# EAGLE board lf-antenna (EAGLE 6.5.0)
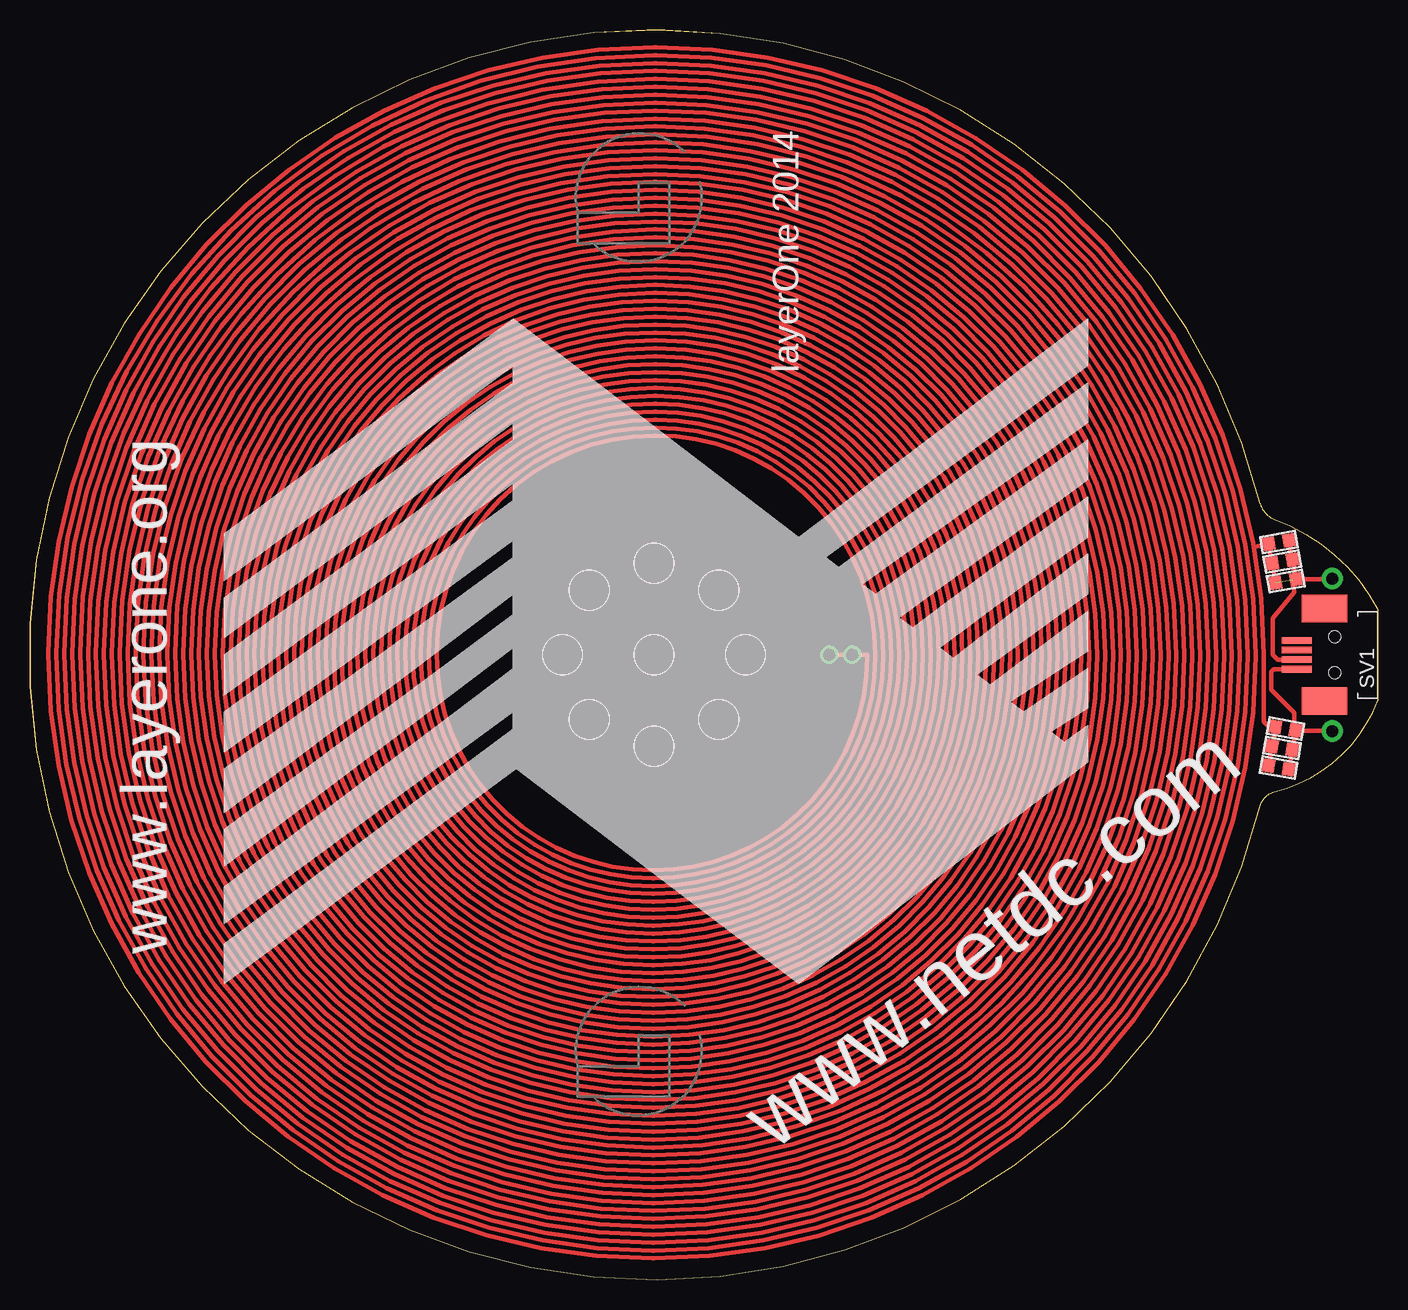
[diagram p0: board, top side]
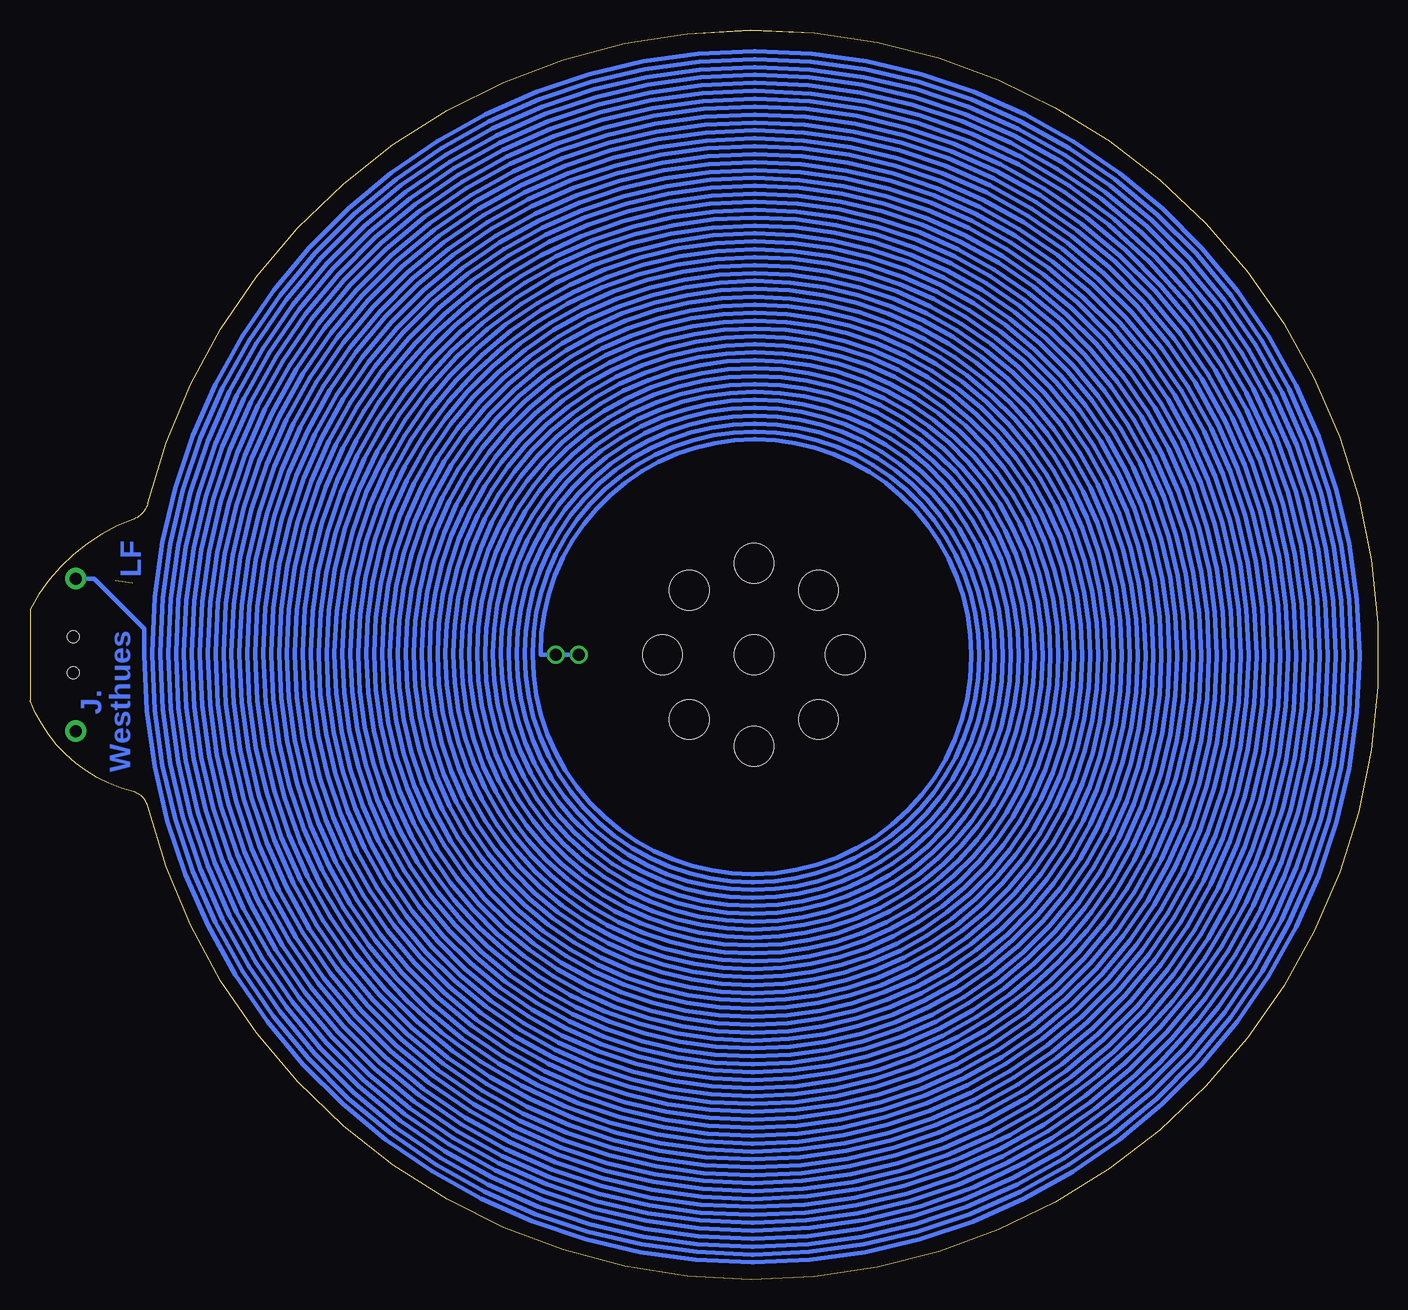
[diagram p1: board, bottom side, seen from below]

Size 112.33 x 104.14 mm. Coordinates in mm from the lower left corner, seen from the top.
Outline: 102.53,64.67 arc332 102.53,39.47 arc-62 103.69,40.64 arc55 112.33,48.26 112.33,55.88 arc42 103.69,63.37 arc-56 102.53,64.67
Copper layers (1*16): Top 0.035mm / dielectric 1.5mm / Bottom 0.035mm
Design rules "ITEADstudio_DRC": minimum track width 6mil, minimum drill 12mil, track to track 6mil, track to pad 6mil, pad to pad 6mil, via to via 6mil, smd to smd 0mil, copper to edge 10mil, drill to drill 10mil, minimum pad ring 10mil, minimum via ring 6mil, stop-mask expansion 2mil, vias tented up to drill 100mil, thermal gap 10mil
Holes 3.3 mm at 52,52.07 44.38,52.07 52,59.69 52,44.45 59.62,52.07 46.61,46.68 57.39,46.68 57.39,57.46 46.61,57.46
Milling: 6 lines

## Footprints (pad centres in the part's own frame; a part is rotated, then mirrored left to right if it is on the bottom)
RLC_0603 = smd 1 x 1.1: 1 -0.85,0; 2 0.85,0
HIROSE-MQ172-4POS = smd 0.55 x 2.5: 1 -1.2,6.75; 2 -0.4,6.75; 3 0.4,6.75; 4 1.2,6.75 | smd 2.3 x 3.8: P$1 -3.85,4.45; P$2 3.85,4.45 | hole 1: -1.5,3.6; 1.5,3.6

## Placement (x,y rotation side)
E$1  [L1LOGO]  50.73,19.05 90 top
E$2  dnp  [RLC_0603]  104.65,58.21 190 top
E$3  1000 pF  [RLC_0603]  104.36,59.83 190 top
E$4  220 pF  [RLC_0603]  104.07,61.46 190 top
E$5  dnp  [RLC_0603]  104.05,42.67 170 top
E$6  dnp  [RLC_0603]  104.34,44.3 170 top
E$7  zerohm  [RLC_0603]  104.62,45.93 170 top
E$8  [L1LOGO]  50.73,90.17 90 top
SV1  [HIROSE-MQ172-4POS]  112.33,52.07 90 top

## Library data of the parts
E$1 E$8 = STM32-PROX
E$2-E$7 SV1 =   merged

## Nets
BUFD: E$5.1 E$6.1 E$7.1 SV1.1
RAW: E$2.1 E$2.2 E$3.1 E$3.2 E$4.1 E$4.2 E$5.2 E$6.2 E$7.2 SV1.2

## Tracks (layer width: path | path; a pad name or v marks a point on that pad's centre or on a via)
BUFD  (via drill 1 pad 1.78)
  Top 0.381: 104.92,42.48 E$5.1 105.22,44.2 E$6.1 | 105.19,44.02 105.21,44.11 E$6.1 | E$7.1 105.49,45.73 108.5,45.73 v108.52,45.72 | E$7.1 105.47,45.72 E$6.1 | SV1.1 103.63,50.87 103.44,50.67 103.44,49.15 105.34,47.24 105.34,45.72 105.4,45.78 E$7.1
RAW  (via drill 1, 1 pad 1.78)  (1 unrouted)
  Top 0.381: 69.78,52.07 69.78,51.9 arc-90 52,34.12 51.84,34.12 arc-90 33.89,52.07 33.89,52.23 arc-90 52,70.34 52.17,70.34 arc-90 70.44,52.07 70.44,51.9 arc-90 52,33.46 51.84,33.46 arc-90 33.23,52.07 33.23,52.23 arc-90 52,71 52.17,71 arc-90 71.1,52.07 71.1,51.9 arc-90 52,32.8 51.84,32.8 arc-90 32.57,52.07 32.57,52.23 arc-90 52,71.67 52.17,71.67 arc-90 71.76,52.07 71.76,51.9 arc-90 52,32.14 51.84,32.14 arc-90 31.91,52.07 31.91,52.23 arc-90 52,72.33 52.17,72.33 arc-90 72.42,52.07 72.42,51.9 arc-90 52,31.48 51.84,31.48 arc-90 31.25,52.07 31.25,52.23 arc-90 52,72.99 52.17,72.99 arc-90 73.08,52.07 73.08,51.9 arc-90 52,30.82 51.84,30.82 arc-90 30.59,52.07 30.59,52.23 arc-90 52,73.65 52.17,73.65 arc-90 73.74,52.07 73.74,51.9 arc-90 52,30.16 51.84,30.16 arc-90 29.93,52.07 29.93,52.23 arc-90 52,74.31 52.17,74.31 arc-90 74.41,52.07 74.41,51.9 arc-90 52,29.5 51.84,29.5 arc-90 29.27,52.07 29.27,52.23 arc-90 52,74.97 52.17,74.97 arc-90 75.07,52.07 75.07,51.9 arc-90 52,28.84 51.84,28.84 arc-90 28.61,52.07 28.61,52.23 arc-90 52,75.63 52.17,75.63 arc-90 75.73,52.07 75.73,51.9 arc-90 52,28.18 51.84,28.18 arc-90 27.95,52.07 27.95,52.23 arc-90 52,76.29 52.17,76.29 arc-90 76.39,52.07 76.39,51.9 arc-90 52,27.52 51.84,27.52 arc-90 27.29,52.07 27.29,52.23 arc-90 52,76.95 52.17,76.95 arc-90 77.05,52.07 77.05,51.9 arc-90 52,26.86 51.84,26.86 arc-90 26.63,52.07 26.63,52.23 arc-90 52,77.61 52.17,77.61 arc-90 77.71,52.07 77.71,51.9 arc-90 52,26.2 51.84,26.2 arc-90 25.97,52.07 25.97,52.23 arc-90 52,78.27 52.17,78.27 arc-90 78.37,52.07 78.37,51.9 arc-90 52,25.54 51.84,25.54 arc-90 25.31,52.07 25.31,52.23 arc-90 52,78.93 52.17,78.93 arc-90 79.03,52.07 79.03,51.9 arc-90 52,24.88 51.84,24.88 arc-90 24.65,52.07 24.65,52.23 arc-90 52,79.59 52.17,79.59 arc-90 79.69,52.07 79.69,51.9 arc-90 52,24.22 51.84,24.22 arc-90 23.99,52.07 23.99,52.23 arc-90 52,80.25 52.17,80.25 arc-90 80.35,52.07 80.35,51.9 arc-90 52,23.56 51.84,23.56 arc-90 23.33,52.07 23.33,52.23 arc-90 52,80.91 52.17,80.91 arc-90 81.01,52.07 81.01,51.9 arc-90 52,22.9 51.84,22.9 arc-90 22.67,52.07 22.67,52.23 arc-90 52,81.57 52.17,81.57 arc-90 81.67,52.07 81.67,51.9 arc-90 52,22.24 51.84,22.24 arc-90 22.01,52.07 22.01,52.23 arc-90 52,82.23 52.17,82.23 arc-90 82.33,52.07 82.33,51.9 arc-90 52,21.58 51.84,21.58 arc-90 21.34,52.07 21.35,52.23 arc-90 52,82.89 52.17,82.89 arc-90 82.99,52.07 82.99,51.9 arc-90 52,20.92 51.84,20.92 arc-90 20.68,52.07 20.68,52.23 arc-90 52,83.55 52.17,83.55 arc-90 83.65,52.07 83.65,51.9 arc-90 52,20.26 51.84,20.26 arc-90 20.02,52.07 20.02,52.23 arc-90 52,84.21 52.17,84.21 arc-90 84.31,52.07 84.31,51.9 arc-90 52,19.6 51.84,19.6 arc-90 19.36,52.07 19.36,52.23 arc-90 52,84.87 52.17,84.87 arc-90 84.97,52.07 84.97,51.9 arc-90 52,18.94 51.84,18.94 arc-90 18.7,52.07 18.7,52.23 arc-90 52,85.53 52.17,85.53 arc-90 85.63,52.07 85.63,51.9 arc-90 52,18.28 51.84,18.27 arc-90 18.04,52.07 18.04,52.23 arc-90 52,86.19 52.17,86.19 arc-90 86.29,52.07 86.29,51.9 arc-90 52,17.61 51.84,17.61 arc-90 17.38,52.07 17.38,52.23 arc-90 52,86.85 52.17,86.85 arc-90 86.95,52.07 86.95,51.9 arc-90 52,16.95 51.84,16.95 arc-90 16.72,52.07 16.72,52.23 arc-90 52,87.51 52.17,87.52 arc-90 87.61,52.07 87.61,51.9 arc-90 52,16.29 51.84,16.29 arc-90 16.06,52.07 16.06,52.23 arc-90 52,88.18 52.17,88.18 arc-90 88.27,52.07 88.27,51.9 arc-90 52,15.63 51.84,15.63 arc-90 15.4,52.07 15.4,52.23 arc-90 52,88.84 52.17,88.84 arc-90 88.93,52.07 88.93,51.9 arc-90 52,14.97 51.84,14.97 arc-90 14.74,52.07 14.74,52.23 arc-90 52,89.5 52.17,89.5 arc-90 89.59,52.07 89.59,51.9 arc-90 52,14.31 51.84,14.31 arc-90 14.08,52.07 14.08,52.23 arc-90 52,90.16 52.17,90.16 arc-90 90.25,52.07 90.25,51.9 arc-90 52,13.65 51.84,13.65 arc-90 13.42,52.07 13.42,52.23 arc-90 52,90.82 52.17,90.82 arc-90 90.92,52.07 90.92,51.9 arc-90 52,12.99 51.84,12.99 arc-90 12.76,52.07 12.76,52.23 arc-90 52,91.48 52.17,91.48 arc-90 91.58,52.07 91.58,51.9 arc-90 52,12.33 51.84,12.33 arc-90 12.1,52.07 12.1,52.23 arc-90 52,92.14 52.17,92.14 arc-90 92.24,52.07 92.24,51.9 arc-90 52,11.67 51.84,11.67 arc-90 11.44,52.07 11.44,52.23 arc-90 52,92.8 52.17,92.8 arc-90 92.9,52.07 92.9,51.9 arc-90 52,11.01 51.84,11.01 arc-90 10.78,52.07 10.78,52.23 arc-90 52,93.46 52.17,93.46 arc-90 93.56,52.07 93.56,51.9 arc-90 52,10.35 51.84,10.35 arc-90 10.12,52.07 10.12,52.23 arc-90 52,94.12 52.17,94.12 arc-90 94.22,52.07 94.22,51.9 arc-90 52,9.69 51.84,9.69 arc-90 9.46,52.07 9.46,52.23 arc-90 52,94.78 52.17,94.78 arc-90 94.88,52.07 94.88,51.9 arc-90 52,9.03 51.84,9.03 arc-90 8.8,52.07 8.8,52.23 arc-90 52,95.44 52.17,95.44 arc-90 95.54,52.07 95.54,51.9 arc-90 52,8.37 51.84,8.37 arc-90 8.14,52.07 8.14,52.23 arc-90 52,96.1 52.17,96.1 arc-90 96.2,52.07 96.2,51.9 arc-90 52,7.71 51.84,7.71 arc-90 7.48,52.07 7.48,52.23 arc-90 52,96.76 52.17,96.76 arc-90 96.86,52.07 96.86,51.9 arc-90 52,7.05 51.84,7.05 arc-90 6.82,52.07 6.82,52.23 arc-90 52,97.42 52.17,97.42 arc-90 97.52,52.07 97.52,51.9 arc-90 52,6.39 51.84,6.39 arc-90 6.16,52.07 6.16,52.23 arc-90 52,98.08 52.17,98.08 arc-90 98.18,52.07 98.18,51.9 arc-90 52,5.73 51.84,5.73 arc-90 5.5,52.07 5.5,52.23 arc-90 52,98.74 52.17,98.74 arc-90 98.84,52.07 98.84,51.9 arc-90 52,5.07 51.84,5.07 arc-90 4.83,52.07 4.83,52.23 arc-90 52,99.4 52.17,99.4 arc-90 99.5,52.07 99.5,51.9 arc-90 52,4.41 51.84,4.41 arc-90 4.17,52.07 4.17,52.23 arc-90 52,100.06 52.17,100.06 arc-90 100.16,52.07 100.16,51.9 arc-90 52,3.75 51.84,3.75 arc-90 3.51,52.07 3.51,52.23 arc-90 52,100.72 52.17,100.72 arc-90 100.82,52.07 100.82,51.9 arc-90 52,3.09 51.84,3.09 arc-90 2.85,52.07 2.85,52.23 arc-90 52,101.38 52.17,101.38 arc-90 101.48,52.07 101.48,51.9 arc-90 52,2.43 51.84,2.43 arc-90 2.19,52.07 2.19,52.23 arc-90 52,102.04 52.17,102.04 arc-90 102.14,52.07 102.14,51.9 arc-90 52,1.77 51.84,1.77 arc-90 1.53,52.07 1.53,52.23 arc-90 52,102.7 52.17,102.7 arc-90 102.8,52.07 102.8,51.69 102.8,46.48 103.06,46.23 103.56,46.23 103.72,46.07 E$7.2
  Top 0.381: v66.61,52.07 v68.51,52.07 69.78,52.07 | E$2.1 E$3.1 E$4.1 | E$2.2 103.79,58.15 103.75,58.18 103.78,58.23 103.56,59.56 E$3.2 103.48,59.68 103.51,59.73 103.18,61.21 103.22,61.29 | 103.22,61.29 E$4.2 | 103.22,61.29 102.04,61.06 | v108.52,58.42 108.52,58.29 108.45,58.36 E$2.1 | E$7.2 103.74,46.04 | 103.61,44.56 103.6,44.52 E$6.2 | E$6.2 103.47,44.49 | E$6.2 103.44,44.32 E$5.2 | E$7.2 103.82,45.97 E$6.2 | 69.78,52.07 | v66.61,52.07 | v66.61,52.07 69.78,52.07 | SV1.2 103.96,51.67 103.56,52.07 103.56,55.12 105.34,57.28 105.22,58.29 E$2.1
  Bottom 0.381: 67.24,52.07 69.78,52.07 69.78,52.23 arc90 52,70.01 51.84,70.01 arc90 33.89,52.07 33.89,51.9 arc90 52,33.79 52.17,33.79 arc90 70.44,52.07 70.44,52.23 arc90 52,70.67 51.84,70.67 arc90 33.23,52.07 33.23,51.9 arc90 52,33.13 52.17,33.13 arc90 71.1,52.07 71.1,52.23 arc90 52,71.34 51.84,71.34 arc90 32.57,52.07 32.57,51.9 arc90 52,32.47 52.17,32.47 arc90 71.76,52.07 71.76,52.23 arc90 52,72 51.84,72 arc90 31.91,52.07 31.91,51.9 arc90 52,31.81 52.17,31.81 arc90 72.42,52.07 72.42,52.23 arc90 52,72.66 51.84,72.66 arc90 31.25,52.07 31.25,51.9 arc90 52,31.15 52.17,31.15 arc90 73.08,52.07 73.08,52.23 arc90 52,73.32 51.84,73.32 arc90 30.59,52.07 30.59,51.9 arc90 52,30.49 52.17,30.49 arc90 73.74,52.07 73.74,52.23 arc90 52,73.98 51.84,73.98 arc90 29.93,52.07 29.93,51.9 arc90 52,29.83 52.17,29.83 arc90 74.41,52.07 74.41,52.23 arc90 52,74.64 51.84,74.64 arc90 29.27,52.07 29.27,51.9 arc90 52,29.17 52.17,29.17 arc90 75.07,52.07 75.07,52.23 arc90 52,75.3 51.84,75.3 arc90 28.61,52.07 28.61,51.9 arc90 52,28.51 52.17,28.51 arc90 75.73,52.07 75.73,52.23 arc90 52,75.96 51.84,75.96 arc90 27.95,52.07 27.95,51.9 arc90 52,27.85 52.17,27.85 arc90 76.39,52.07 76.39,52.23 arc90 52,76.62 51.84,76.62 arc90 27.29,52.07 27.29,51.9 arc90 52,27.19 52.17,27.19 arc90 77.05,52.07 77.05,52.23 arc90 52,77.28 51.84,77.28 arc90 26.63,52.07 26.63,51.9 arc90 52,26.53 52.17,26.53 arc90 77.71,52.07 77.71,52.23 arc90 52,77.94 51.84,77.94 arc90 25.97,52.07 25.97,51.9 arc90 52,25.87 52.17,25.87 arc90 78.37,52.07 78.37,52.23 arc90 52,78.6 51.84,78.6 arc90 25.31,52.07 25.31,51.9 arc90 52,25.21 52.17,25.21 arc90 79.03,52.07 79.03,52.23 arc90 52,79.26 51.84,79.26 arc90 24.65,52.07 24.65,51.9 arc90 52,24.55 52.17,24.55 arc90 79.69,52.07 79.69,52.23 arc90 52,79.92 51.84,79.92 arc90 23.99,52.07 23.99,51.9 arc90 52,23.89 52.17,23.89 arc90 80.35,52.07 80.35,52.23 arc90 52,80.58 51.84,80.58 arc90 23.33,52.07 23.33,51.9 arc90 52,23.23 52.17,23.23 arc90 81.01,52.07 81.01,52.23 arc90 52,81.24 51.84,81.24 arc90 22.67,52.07 22.67,51.9 arc90 52,22.57 52.17,22.57 arc90 81.67,52.07 81.67,52.23 arc90 52,81.9 51.84,81.9 arc90 22.01,52.07 22.01,51.9 arc90 52,21.91 52.17,21.91 arc90 82.33,52.07 82.33,52.23 arc90 52,82.56 51.84,82.56 arc90 21.34,52.07 21.34,51.9 arc90 52,21.25 52.17,21.25 arc90 82.99,52.07 82.99,52.23 arc90 52,83.22 51.84,83.22 arc90 20.68,52.07 20.68,51.9 arc90 52,20.59 52.17,20.59 arc90 83.65,52.07 83.65,52.23 arc90 52,83.88 51.84,83.88 arc90 20.02,52.07 20.02,51.9 arc90 52,19.93 52.17,19.93 arc90 84.31,52.07 84.31,52.23 arc90 52,84.54 51.84,84.54 arc90 19.36,52.07 19.36,51.9 arc90 52,19.27 52.17,19.27 arc90 84.97,52.07 84.97,52.23 arc90 52,85.2 51.84,85.2 arc90 18.7,52.07 18.7,51.9 arc90 52,18.61 52.17,18.61 arc90 85.63,52.07 85.63,52.23 arc90 52,85.86 51.84,85.86 arc90 18.04,52.07 18.04,51.9 arc90 52,17.94 52.17,17.94 arc90 86.29,52.07 86.29,52.23 arc90 52,86.52 51.84,86.52 arc90 17.38,52.07 17.38,51.9 arc90 52,17.28 52.17,17.28 arc90 86.95,52.07 86.95,52.23 arc90 52,87.18 51.84,87.18 arc90 16.72,52.07 16.72,51.9 arc90 52,16.62 52.17,16.62 arc90 87.61,52.07 87.61,52.23 arc90 52,87.85 51.84,87.85 arc90 16.06,52.07 16.06,51.9 arc90 52,15.96 52.17,15.96 arc90 88.27,52.07 88.27,52.23 arc90 52,88.51 51.84,88.51 arc90 15.4,52.07 15.4,51.9 arc90 52,15.3 52.17,15.3 arc90 88.93,52.07 88.93,52.23 arc90 52,89.17 51.84,89.17 arc90 14.74,52.07 14.74,51.9 arc90 52,14.64 52.17,14.64 arc90 89.59,52.07 89.59,52.23 arc90 52,89.83 51.84,89.83 arc90 14.08,52.07 14.08,51.9 arc90 52,13.98 52.17,13.98 arc90 90.25,52.07 90.25,52.23 arc90 52,90.49 51.84,90.49 arc90 13.42,52.07 13.42,51.9 arc90 52,13.32 52.17,13.32 arc90 90.92,52.07 90.92,52.23 arc90 52,91.15 51.84,91.15 arc90 12.76,52.07 12.76,51.9 arc90 52,12.66 52.17,12.66 arc90 91.58,52.07 91.58,52.23 arc90 52,91.81 51.84,91.81 arc90 12.1,52.07 12.1,51.9 arc90 52,12 52.17,12 arc90 92.24,52.07 92.24,52.23 arc90 52,92.47 51.84,92.47 arc90 11.44,52.07 11.44,51.9 arc90 52,11.34 52.17,11.34 arc90 92.9,52.07 92.9,52.23 arc90 52,93.13 51.84,93.13 arc90 10.78,52.07 10.78,51.9 arc90 52,10.68 52.17,10.68 arc90 93.56,52.07 93.56,52.23 arc90 52,93.79 51.84,93.79 arc90 10.12,52.07 10.12,51.9 arc90 52,10.02 52.17,10.02 arc90 94.22,52.07 94.22,52.23 arc90 52,94.45 51.84,94.45 arc90 9.46,52.07 9.46,51.9 arc90 52,9.36 52.17,9.36 arc90 94.88,52.07 94.88,52.23 arc90 52,95.11 51.84,95.11 arc90 8.8,52.07 8.8,51.9 arc90 52,8.7 52.17,8.7 arc90 95.54,52.07 95.54,52.23 arc90 52,95.77 51.84,95.77 arc90 8.14,52.07 8.14,51.9 arc90 52,8.04 52.17,8.04 arc90 96.2,52.07 96.2,52.23 arc90 52,96.43 51.84,96.43 arc90 7.48,52.07 7.48,51.9 arc90 52,7.38 52.17,7.38 arc90 96.86,52.07 96.86,52.23 arc90 52,97.09 51.84,97.09 arc90 6.82,52.07 6.82,51.9 arc90 52,6.72 52.17,6.72 arc90 97.52,52.07 97.52,52.23 arc90 52,97.75 51.84,97.75 arc90 6.16,52.07 6.16,51.9 arc90 52,6.06 52.17,6.06 arc90 98.18,52.07 98.18,52.23 arc90 52,98.41 51.84,98.41 arc90 5.5,52.07 5.5,51.9 arc90 52,5.4 52.17,5.4 arc90 98.84,52.07 98.84,52.23 arc90 52,99.07 51.84,99.07 arc90 4.83,52.07 4.83,51.9 arc90 52,4.74 52.17,4.74 arc90 99.5,52.07 99.5,52.23 arc90 52,99.73 51.84,99.73 arc90 4.17,52.07 4.17,51.9 arc90 52,4.08 52.17,4.08 arc90 100.16,52.07 100.16,52.23 arc90 52,100.39 51.84,100.39 arc90 3.51,52.07 3.51,51.9 arc90 52,3.42 52.17,3.42 arc90 100.82,52.07 100.82,52.23 arc90 52,101.05 51.84,101.05 arc90 2.85,52.07 2.85,51.9 arc90 52,2.76 52.17,2.76 arc90 101.48,52.07 101.48,52.23 arc90 52,101.71 51.84,101.71 arc90 2.19,52.07 2.19,51.9 arc90 52,2.1 52.17,2.1 arc90 102.14,52.07 102.14,52.23 arc90 52,102.37 51.84,102.37 arc90 1.53,52.07 1.53,51.9 arc90 52,1.43 52.17,1.43 arc90 102.8,52.07 102.8,54.23 106.99,58.42 v108.52,58.42
  Bottom 0.381: 67.24,52.07 | 67.24,52.07 v66.61,52.07

## Text on the board
Bottom: LF | J. | Westhues
tPlace: layerOne 2014 | www.netdc.com | www.layerone.org
bStop: LF
tDocu: sponsored by
bDocu: Badge Team | arko | charliex | krs | mmca